# Altium PCB AC_board.PcbDoc (part 1 of 3)
Units mil, origin at the board's own origin, x right, y up, seen from the top; angles counter-clockwise.
Board outline 5905.51 x 3937.01 mil, 4 copper layers (Top Layer, Layer 1, Layer 2, Bottom Layer), stack 31.891 mil thick; 42 components, 37 nets, 171 pads, 2365 vias.
Unrouted connection lines stored in the file: 10.
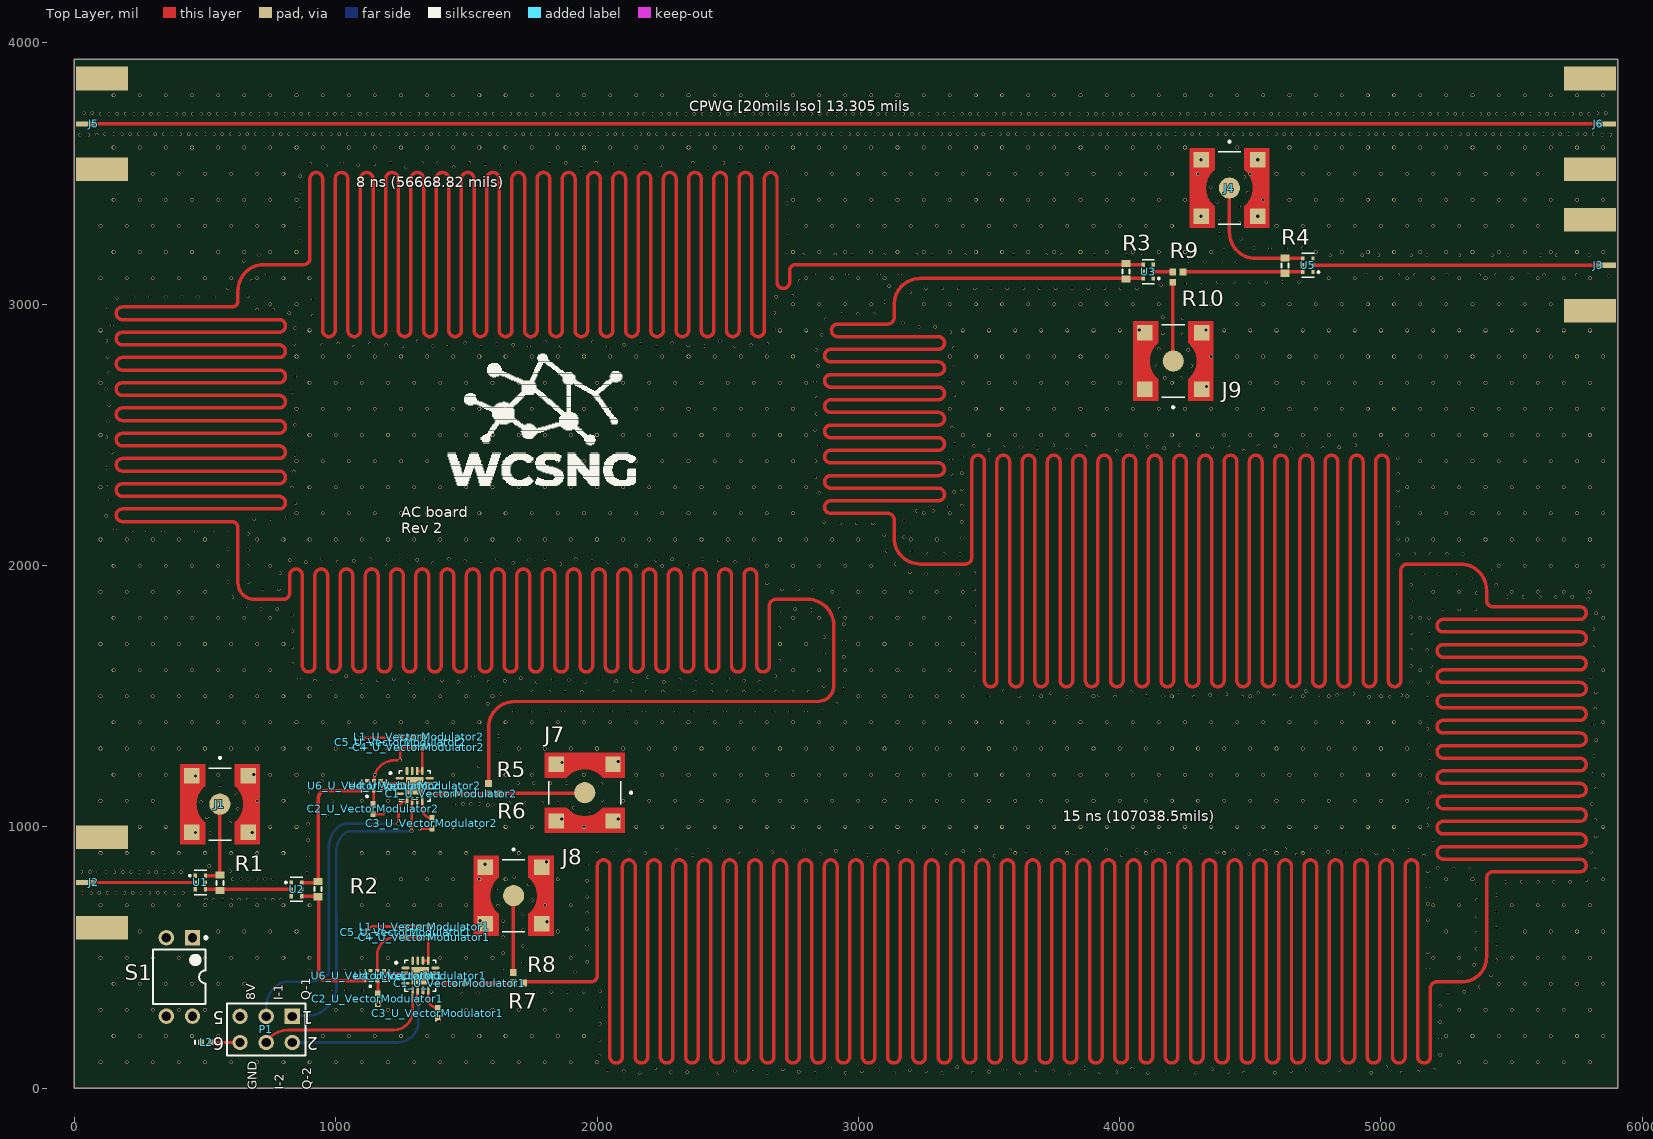
[diagram p0: Top Layer view]
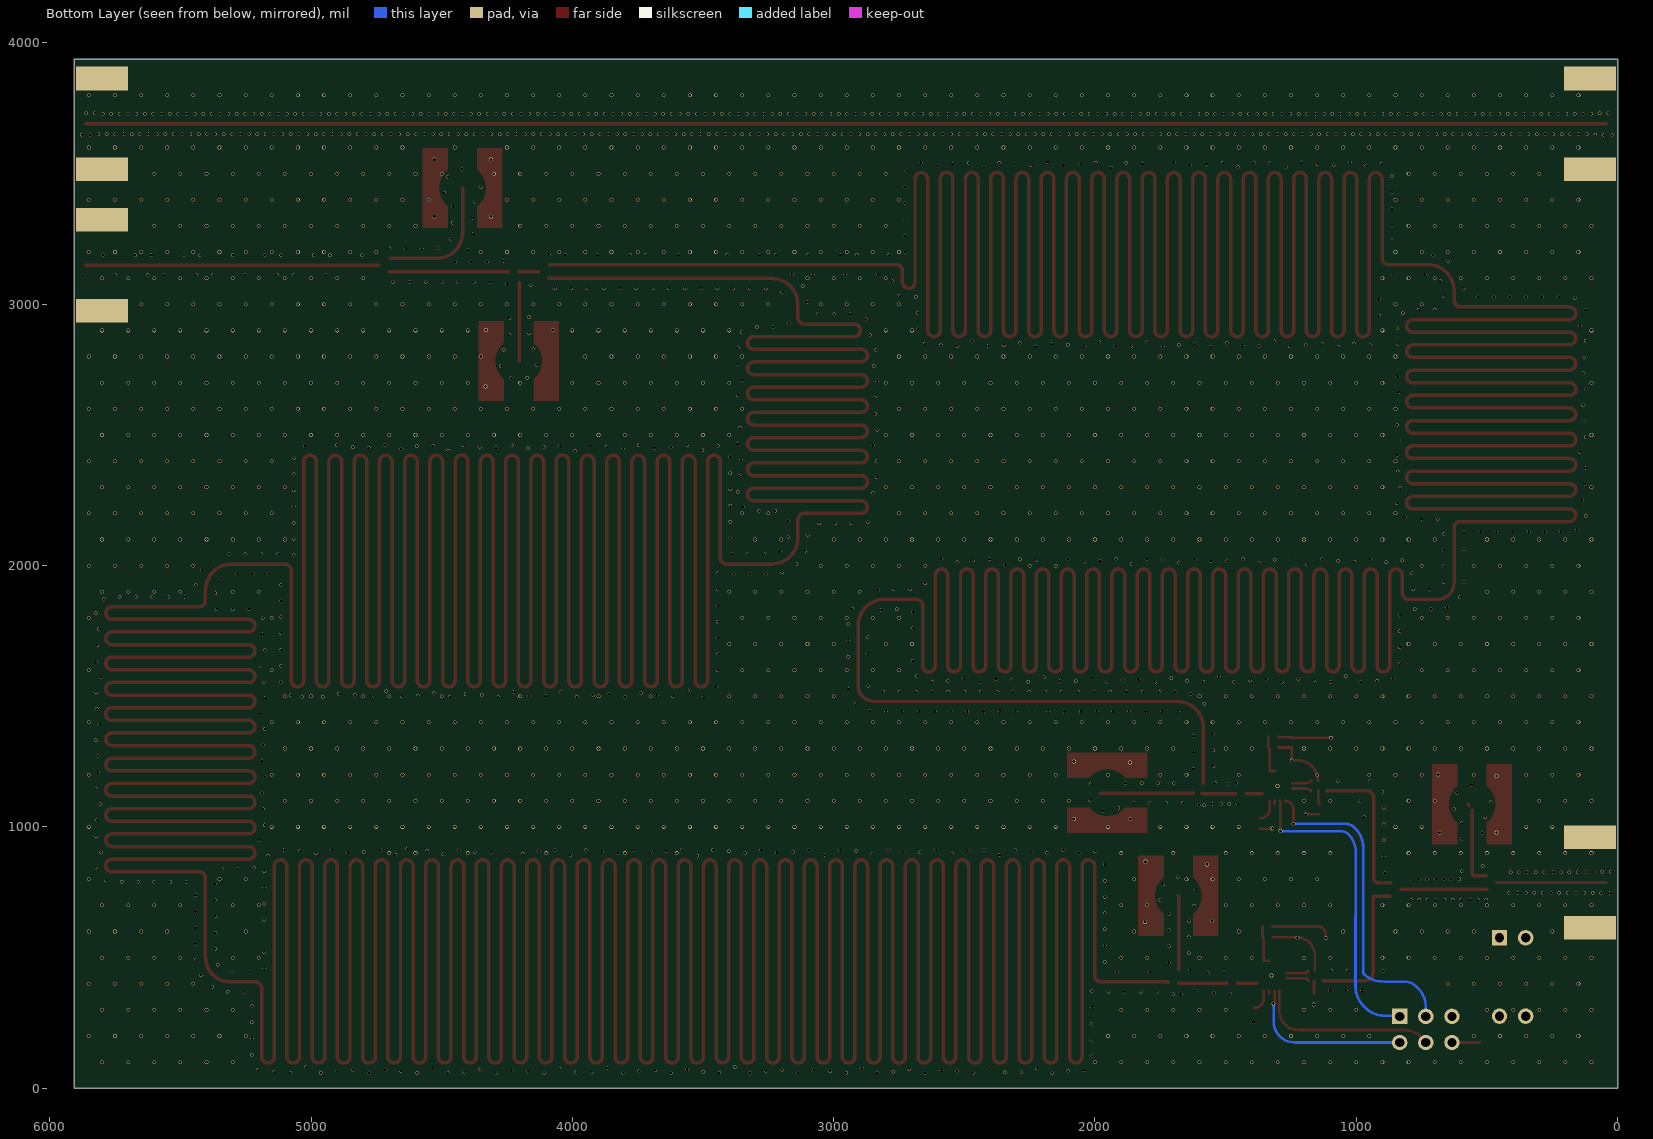
[diagram p1: Bottom Layer view, seen from below]
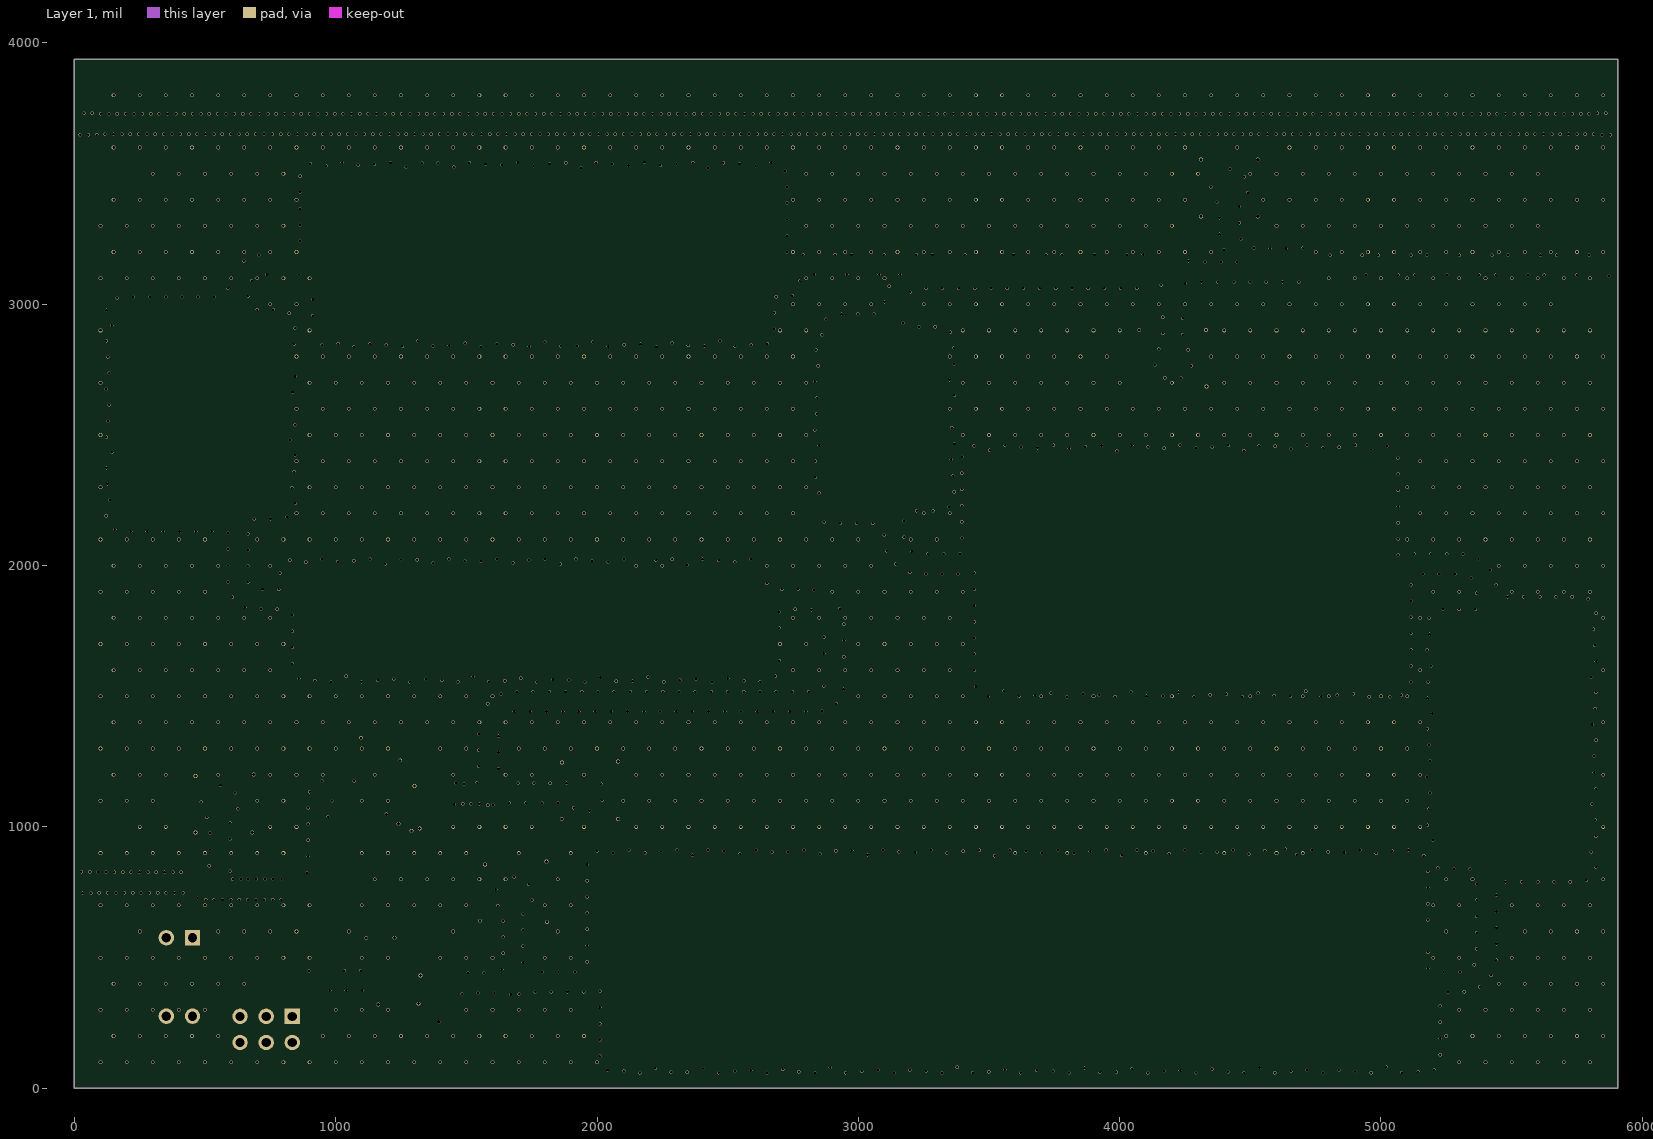
[diagram p2: Layer 1]
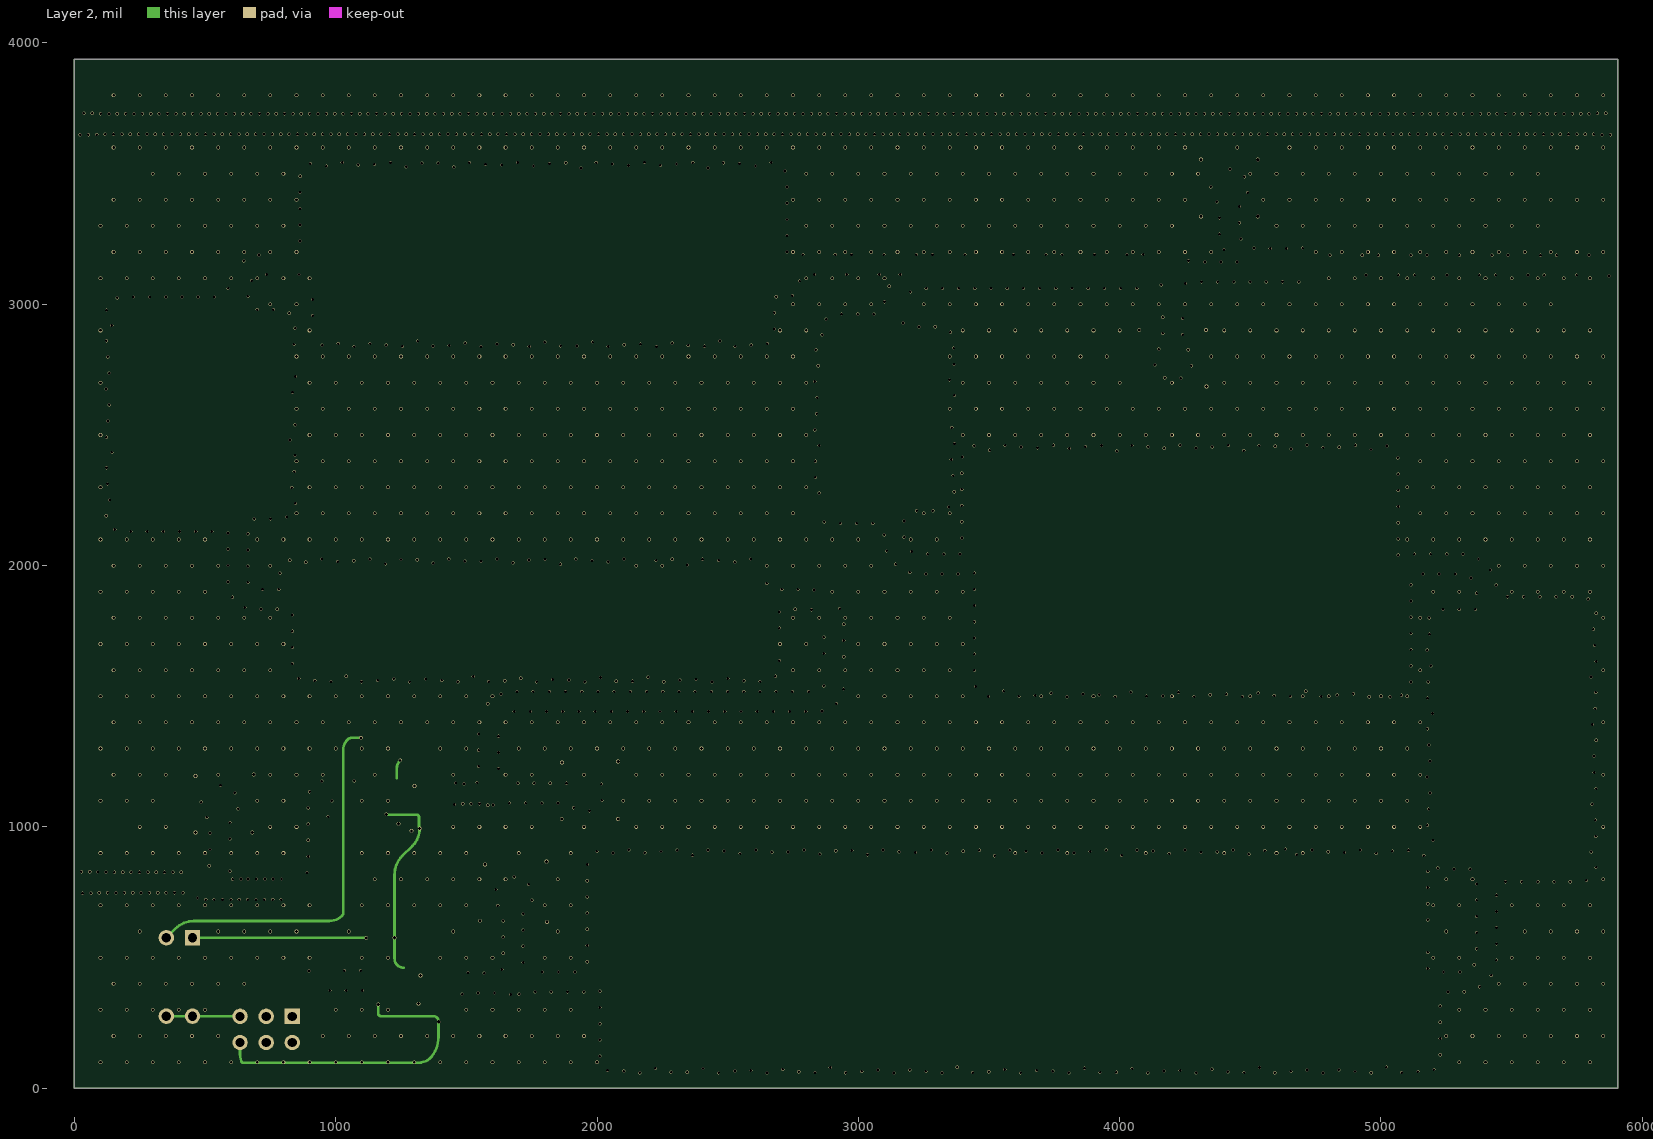
[diagram p3: Layer 2]

## Layer stack, top to bottom
Top Solder: solder mask 0.4, Solder Resist, Dk 3.5
Top Layer: signal copper 1.3778
Isola 408HR-1: prepreg 6.8898, FR4, Dk 3.64
Layer 1: signal copper 1.3778
Isola 408HR-Core: dielectric 12.6, FR-4, Dk 3.64
Layer 2: signal copper 1.3778
Isola 408HR-2: prepreg 6.8898, FR4, Dk 3.64
Bottom Layer: signal copper 1.3778
Bottom Solder: solder mask 0.4, Solder Resist, Dk 3.5

## Board outline
0,0 5905.51,0 5905.51,3937.01 0,3937.01

## Design rules (kind name [scope] priority, off if disabled: settings)
BoardOutlineClearance [All] p1: gap=10 ignorepadtopadclearanceinfootprint=FALSE
Clearance "Schematic Clearance Constraint_1" [InNetClass('HMC RF IN')] p1: gap=4.07 ignorepadtopadclearanceinfootprint=FALSE
Clearance "Schematic Clearance Constraint" [InNetClass('RF Nets')] p2: gap=20 ignorepadtopadclearanceinfootprint=FALSE except(3: Arc-SMDPad Track-SMDPad SMDPad-SMDPad)
Clearance "HMC RF IN Clearance" [InNetClass('HMC RF IN')] p3: gap=4.07 ignorepadtopadclearanceinfootprint=FALSE
Clearance [All] p4: gap=10 ignorepadtopadclearanceinfootprint=FALSE except(0: Arc-Hole Track-Hole SMDPad-Hole THPad-Hole Via-Hole Fill-Hole Poly-Hole Region-Hole Text-Hole; 6: Arc-Arc Arc-Track Arc-SMDPad Track-Track Track-SMDPad SMDPad-SMDPad)
Clearance "RF Clearance" [InNetClass('RF Nets')] p5: gap=10 ignorepadtopadclearanceinfootprint=FALSE
Length "Tap 2 Length" [InNet('No Net') And OnLayer('Top Layer')] p1: maxlimit=38652.77 minlimit=38652.77
Length "Tap 1 Length" [InNet('No Net') And OnLayer('Top Layer')] p2: maxlimit=24911.29 minlimit=24911.29
MatchedLengths [InNetClass('Taps')] p1: tolerance=0 checknetsindiffpair=FALSE checkdiffpairvsdiffpair=TRUE checkxsignals=TRUE checkothers=TRUE
MinimumSolderMaskSliver [All] p1: minsoldermaskwidth=0
PlaneConnect [All] p1: planeconnectstyle=Direct reliefexpansion=20 reliefentries=4 reliefconductorwidth=10 reliefairgap=10
PolygonConnect [All] p1: connectstyle=Direct reliefconductorwidth=10 reliefentries=4 polygonreliefangle="90 Angle" airgapwidth=10
RoomDefinition U_VectorModulator2 [InComponentClass('U_VectorModulator2')] p1: confinementstyle=ConfineIn formatcopy=TRUE lockcomponents=FALSE outline 1067.06,964.2 1497.06,964.2 1497.06,1389.2 1067.06,1389.2
RoomDefinition U_VectorModulator1 [InComponentClass('U_VectorModulator1')] p2: confinementstyle=ConfineIn formatcopy=TRUE lockcomponents=FALSE outline 1060.86,219.07 1490.86,219.07 1490.86,665.07 1060.86,665.07
RoutingVias [All] p1: holewidth=12 width=14 viastyle="Through Hole" minholewidth=8 minwidth=10 maxholewidth=17 maxwidth=20
SilkToSolderMaskClearance [IsPad] p1: minsilkscreentomaskgap=5 clearancetoexposedcopper=TRUE
SolderMaskExpansion [All] p1: expansion=4 istentingtop=FALSE
Width "Schematic Width Constraint_1" [InNetClass('RF Nets')] p1: maxlimit=13.3 minlimit=13.3 preferedwidth=13.3
Width "Schematic Width Constraint" [InNetClass('HMC RF IN')] p2: maxlimit=10 minlimit=10 preferedwidth=10
Width "HMC RF IN Width" [InNetClass('HMC RF IN')] p3: maxlimit=10 minlimit=10 preferedwidth=10
Width "RF Width" [InNetClass('RF Nets')] p4: maxlimit=13.3 minlimit=13.3 preferedwidth=13.31
Width [All] p5: maxlimit=10 minlimit=10 preferedwidth=10
27 further rules are at their usual default settings.

## Classes and differential pairs
net class "HMC RF IN": HMCIN_U_VectorModulator1 HMCIN_U_VectorModulator2 HMCINbar_U_VectorModulator1 HMCINbar_U_VectorModulator2
net class "RF Nets": B-IP B-OP NetC1_U_VectorModulator1_1 NetC1_U_VectorModulator1_2 NetC1_U_VectorModulator2_1 NetC1_U_VectorModulator2_2 NetJ5_SIG NetJ7_C NetJ8_C NetJ9_C NetR9_1 RF-C1 RF-C1-1 RF-C1-2 RF-S1 RF-S2-1 RF-S2-2 RXin TXout
channel class VectorModulator: U_VectorModulator1 U_VectorModulator2
component class U_VectorModulator2: C1_U_VectorModulator2 C2_U_VectorModulator2 C3_U_VectorModulator2 C4_U_VectorModulator2 C5_U_VectorModulator2 L1_U_VectorModulator2 U4_U_VectorModulator2 U6_U_VectorModulator2
component class U_VectorModulator1: C1_U_VectorModulator1 C2_U_VectorModulator1 C3_U_VectorModulator1 C4_U_VectorModulator1 C5_U_VectorModulator1 L1_U_VectorModulator1 U4_U_VectorModulator1 U6_U_VectorModulator1
component class AC_board: J2 J3 J4 J5 J6 J7 J8 J9 L2 R5 R6 R7 R8 R9 U1 U2 U3 U5

## Components (designator, comment, footprint, x,y, rotation, side; value= is the part's Value field where it differs from the comment)
C1_U_VectorModulator1 "Cap Semi" 0402 1474.67,401.51 r0 top value=5pF (schematic designator C1)
C1_U_VectorModulator2 "Cap Semi" 0402 1441.31,1127 r0 top value=5pF (schematic designator C1)
C2_U_VectorModulator1 "Cap Semi" 0402 1161,343 r90 top value=100pF (schematic designator C2)
C2_U_VectorModulator2 "Cap Semi" 0402 1143.32,1068.68 r90 top value=100pF (schematic designator C2)
C3_U_VectorModulator1 "Cap Semi" 0402 1390.24,287.69 r90 top value=100pF (schematic designator C3)
C3_U_VectorModulator2 "Cap Semi" 0402 1368.32,1013.68 r90 top value=100pF (schematic designator C3)
C4_U_VectorModulator1 "Cap Semi" 0402 1339.24,578 r0 top value=4.7uF (schematic designator C4)
C4_U_VectorModulator2 "Cap Semi" 0402 1317.31,1304 r0 top value=4.7uF (schematic designator C4)
C5_U_VectorModulator1 "Cap Semi" 0402 1270.24,597.69 r90 top value=100pF (schematic designator C5)
C5_U_VectorModulator2 "Cap Semi" 0402 1248.32,1323.68 r90 top value=100pF (schematic designator C5)
J1 "CONSMA001-SMD-G" *LINX_CONSMA001-SMD-G_CONSMA001-SMD-G(Primary) 557,1087.27 r0 top
J2 "SMA 50 Ohm edge" "SMA-OSHPARK-4L-1.6MM- ALT3" 5,787.4 r0 top locked
J3 "SMA 50 Ohm edge" "SMA-OSHPARK-4L-1.6MM- ALT3" 5900.51,3149.61 r180 top locked
J4 "CONSMA001-SMD-G" *LINX_CONSMA001-SMD-G_CONSMA001-SMD-G(Primary) 4420,3445 r0 top
J5 "SMA 50 Ohm edge" "SMA-OSHPARK-4L-1.6MM- ALT3" 5,3690 r0 top locked
J6 "SMA 50 Ohm edge" "SMA-OSHPARK-4L-1.6MM- ALT3" 5900.51,3690 r180 top locked
J7 "CONSMA001-SMD-G" *LINX_CONSMA001-SMD-G_CONSMA001-SMD-G(Primary) 1953,1131 r270 top
J8 "CONSMA001-SMD-G" *LINX_CONSMA001-SMD-G_CONSMA001-SMD-G(Primary) 1681,737 r0 top
J9 "CONSMA001-SMD-G" *LINX_CONSMA001-SMD-G_CONSMA001-SMD-G(Primary) 4205,2783 r180 top
L1_U_VectorModulator1 "Inductor" 0402-A 1339.24,619 r0 top value=0.33uH (schematic designator L1)
L1_U_VectorModulator2 "Inductor" 0402-A 1317.31,1345 r0 top value=0.33uH (schematic designator L1)
L2 "Inductor" 0402-A 504.08,176.02 r0 top value=10mH
P1 "Header 3X2" HDR2X3 834,275 r180 top
R1 "Res3" J1-0603 557,786 r270 top value=100
R2 "Res3" J1-0603 932,762 r270 top value=100
R3 "Res3" J1-0603 4024,3126 r270 top value=100
R4 "Res3" J1-0603 4633,3148 r270 top value=100
R5 "CRCW04020000Z0ED" RESC1005X40X25ML05T05 1585,1146.68 r90 top
R6 "CRCW04020000Z0ED" RESC1005X40X25ML05T05 1604.68,1127 r0 top
R7 "CRCW04020000Z0ED" RESC1005X40X25ML05T05 1699.68,403 r0 top
R8 "CRCW04020000Z0ED" RESC1005X40X25ML05T05 1680,423 r90 top
R9 "CRCW04020000Z0ED" RESC1005X40X25ML05T05 4223,3123.62 r0 top
R10 "CRCW04020000Z0ED" RESC1005X40X25ML05T05 4203,3104 r270 top
S1 "SW DIP-2" DIP-4 402,426 r270 top
U1 "Anaren PD0810J5050S2HF" *ANAREN_PD0409J7575S2HF 482.09,787.4 r0 top
U2 "Anaren PD0810J5050S2HF" *ANAREN_PD0409J7575S2HF 850,761 r0 top
U3 "Anaren PD0810J5050S2HF" *ANAREN_PD0409J7575S2HF 4109.49,3125 r180 top
U4_U_VectorModulator1 "HMC630" *QFN50P300X300X100-17N 1324.14,430.91 r0 top (schematic designator U4)
U4_U_VectorModulator2 "HMC630" *QFN50P300X300X100-17N 1302.21,1156.91 r0 top (schematic designator U4)
U5 "Anaren PD0810J5050S2HF" *ANAREN_PD0409J7575S2HF 4720.51,3149.61 r180 top
U6_U_VectorModulator1 "ANAREN_BD0810J50100AHF" *ANAREN_PD0409J7575S2HF 1158.98,430.51 r90 top (schematic designator U6)
U6_U_VectorModulator2 "ANAREN_BD0810J50100AHF" *ANAREN_PD0409J7575S2HF 1146.31,1157 r90 top (schematic designator U6)

## Footprints (in the part's own frame and the unit in brackets; to place one, negate y for a bottom-side part, rotate by r counter-clockwise, add the part's x,y. Pads: shape width x height; smd on the part's side, far side on the other; paste and mask are expansions set on the pad)
0402 [mm] "Chip Capacitor, Body 1.0x0.5mm, IPC High Density"
  rect 0.6x0.5 smd: 1(-0.5,0) 2(0.5,0)
  body extent -0.55,-0.3 0.55,0.3, height 1.3
0402-A [mm] "Chip Inductor, Body 1.0x0.5mm, IPC High Density"
  rect 0.6x0.5 smd: 1(-0.5,0) 2(0.5,0)
  silkscreen extent -1.1,-0.15 -1.1,0.15, body extent -0.55,-0.3 0.55,0.3, height 0.55
*ANAREN_PD0409J7575S2HF [mm]
  rect 0.33x0.41 smd: 1(-0.495,0.66) 2(-0.495,0) 3(-0.495,-0.66) 4(0.495,-0.66) 5(0.495,0) 6(0.495,0.66)
  silkscreen extent -1.05,-1.17 0.6,1.17
*LINX_CONSMA001-SMD-G_CONSMA001-SMD-G(Primary) [mm]
  round 2.05 smd: C(0,0)
  rect 1.5x1.5 smd: G1(-2.75,2.75) G2(-2.75,-2.75) G3(2.75,-2.75) G4(2.75,2.75)
  Top Layer region: -1.44,3.88 -1.44,1.76 -1.54,1.68 -1.6,1.624 -1.687,1.534 -1.769,1.439 -1.845,1.34 -1.916,1.237 -1.981,1.13 -2.04,1.02 -2.093,0.907 -2.139,0.791 -2.18,0.672 -2.213,0.552 -2.241,0.43 -2.261,0.307 -2.275,0.182 -2.281,0.058 -2.281,-0.067 -2.275,-0.192 -2.261,-0.317 -2.241,-0.44 -2.213,-0.562 -2.18,-0.682 -2.139,-0.801 -2.093,-0.917 -2.04,-1.03 -1.981,-1.14 -1.916,-1.247 -1.845,-1.35 -1.769,-1.449 -1.687,-1.544 -1.6,-1.634 -1.54,-1.69 -1.44,-1.76 -1.44,-3.88 -3.88,-3.88 -3.88,3.88 -1.44,3.88
  Top Layer region: 1.44,-3.88 1.44,-1.76 1.54,-1.68 1.573,-1.651 1.663,-1.56 1.747,-1.465 1.827,-1.365 1.9,-1.26 1.968,-1.152 2.029,-1.04 2.085,-0.925 2.133,-0.807 2.175,-0.686 2.21,-0.564 2.239,-0.439 2.26,-0.313 2.274,-0.186 2.281,-0.059 2.281,0.069 2.274,0.196 2.26,0.323 2.239,0.449 2.21,0.574 2.175,0.696 2.133,0.817 2.085,0.935 2.029,1.05 1.968,1.162 1.9,1.27 1.827,1.375 1.747,1.475 1.663,1.57 1.573,1.661 1.54,1.69 1.44,1.76 1.44,3.88 3.88,3.88 3.88,-3.88 1.44,-3.88
  silkscreen extent -1.1,-3.5 1.1,4.6
*QFN50P300X300X100-17N [mm]
  oval 0.8x0.26 smd: 1(-1.455,0.75) 2(-1.455,0.25) 3(-1.455,-0.25) 4(-1.455,-0.75) 9(1.455,-0.75) 10(1.455,-0.25) 11(1.455,0.25) 12(1.455,0.75)
  oval 0.26x0.8 smd: 5(-0.75,-1.455) 6(-0.25,-1.455) 7(0.25,-1.455) 8(0.75,-1.455) 13(0.75,1.455) 14(0.25,1.455) 15(-0.25,1.455) 16(-0.75,1.455)
  rect 1.7x1.7 smd: 17(0,0)
  silkscreen extent -2.45,-1.5 1.5,1.5
DIP-4 [mm] "DIP; 4 Leads; Row Spacing 7.62 mm; Pitch 2.54 mm"
  rect 1.5x1.5 hole 0.9: 1(-3.81,1.27)
  round 1.5 hole 0.9: 2(-3.81,-1.27) 3(3.81,-1.27) 4(3.81,1.27)
  silkscreen extent -3.93,-2.55 2.65,2.7, body extent -3.15,-2.5 3.15,2.5, height 5.6
HDR2X3 [mm] "Connector; Header; 3x2 Position"
  rect 1.5x1.5 hole 0.9: 1(0,0)
  round 1.5 hole 0.9: 2(0,2.54) 3(2.54,0) 4(2.54,2.54) 5(5.08,0) 6(5.08,2.54)
  silkscreen extent -1.27,-1.27 6.35,3.81
J1-0603 [mm] "Chip Resistor, Body 1.6x0.8mm, IPC High Density"
  rect 0.7x0.9 smd: 1(-0.75,0) 2(0.75,0)
  silkscreen extent -0.2,-0.35 0.2,0.35, body extent -0.85,-0.48 0.85,0.48, height 0.9
RESC1005X40X25ML05T05 [mm] "Chip Resistor, 2-Leads, Body 1.00x0.50mm, IPC Low Density"
  rect 0.65x0.65 smd: 1(-0.5,0) 2(0.5,0)
  body extent -0.53,-0.27 0.53,0.28, height 0.4
"SMA-OSHPARK-4L-1.6MM- ALT3" [mil] "Short and thin signal pin"
  rect 200x90 smd: GND(101,-174) GND(101,174)
  rect 200x90 smd far side: GND(101,-174) GND(101,174)
  rect 75x20 smd: SIG(38.5,0)

## Part data
C1_U_VectorModulator1 C1_U_VectorModulator2 C2_U_VectorModulator1 C2_U_VectorModulator2 C3_U_VectorModulator1 C3_U_VectorModulator2 C4_U_VectorModulator1 C4_U_VectorModulator2 C5_U_VectorModulator1 C5_U_VectorModulator2: "Capacitor (Semiconductor SIM Model)", LatestRevisionDate=29-May-2009, LatestRevisionNote="IPC-7351 Footprint Added.", PackageDescription="Chip Capacitor", PackageReference=C1206, Published=8-Jun-2000, Publisher="Altium Limited"
J1 J4: "50 Ohm Gold Plated Female PCB Mount SMA Connector", Package=None, Supplier Part Number 1=CONSMA001-SMD-G-ND, Digi-Key_Part_Number=CONSMA001-SMD-G-ND, Digi-Key_Purchase_URL=https://www.digikey.com/product-detail/en/linx-technologies-inc/CONSMA001-SMD-G/CONSMA001-SMD-G-ND/4496569?utm_source=snapeda&utm_medium=aggregator&utm_campaign=symbol, MF="Linx Technologies", MP=CONSMA001-SMD-G, SnapEDA_Link=https://www.snapeda.com/parts/CONSMA001-SMD-G/Linx%20Technologies%20Inc./view-part/?ref=snap, Supplier 1=Digi-Key
J2 J3 J5 J6: library part SMA-OSHPARK-4L-1.6MM-ALT3, Package=SMA-OSHPARK-4L-1.6MM, Supplier Part Number 1=J658-ND, DeviceName=-OSHPARK-4L-1.6MM, DeviceSetName=SMA, GateName_1=G1, LibraryName=dword1511-connectors, Supplier 1=Digi-Key, SymbolName_1=COAX
J7 J8 J9: "50 Ohm Gold Plated Female PCB Mount SMA Connector", Package=None, Digi-Key_Part_Number=CONSMA001-SMD-G-ND, Digi-Key_Purchase_URL=https://www.digikey.com/product-detail/en/linx-technologies-inc/CONSMA001-SMD-G/CONSMA001-SMD-G-ND/4496569?utm_source=snapeda&utm_medium=aggregator&utm_campaign=symbol, MF="Linx Technologies", MP=CONSMA001-SMD-G, SnapEDA_Link=https://www.snapeda.com/parts/CONSMA001-SMD-G/Linx%20Technologies%20Inc./view-part/?ref=snap
P1: "Header, 3-Pin, Dual row", LatestRevisionDate=17-Jul-2002, LatestRevisionNote="Re-released for DXP Platform.", Publisher="Altium Limited"
R1 R2 R3 R4: "Resistor", LatestRevisionDate=29-May-2009, LatestRevisionNote="IPC-7351 Footprint Added.", PackageDescription="Chip Resistor", PackageReference=J1-0603, Published=8-Jun-2000, Publisher="Altium Limited"
R5 R6 R7 R8 R9 R10: library part CMP-2002-08122-1, Manufacturer="Vishay Dale", Part Number=CRCW04020000Z0ED
S1: "DIP Switch, 2 Position, SPST", LatestRevisionDate=17-Jul-2002, LatestRevisionNote="Re-released for DXP Platform.", PackageReference=DIP-4, Published=24-Mar-1999, Publisher="Altium Limited"
U1 U2 U3 U5: Supplier Part Number 1=1173-1093-1-ND, Supplier 1=Digi-Key, U*=1173-1093-1-ND
U4_U_VectorModulator1 U4_U_VectorModulator2: Supplier Part Number 1=1127-1497-ND, Supplier 1=Digi-Key
U6_U_VectorModulator1 U6_U_VectorModulator2: Supplier Part Number 1=1173-1056-1-ND, Supplier 1=Digi-Key
L1_U_VectorModulator1 L1_U_VectorModulator2 L2: Code_IEC=1005, Code_JEITA=0402, LatestRevisionDate=29-May-2009, LatestRevisionNote="IPC-7351 Footprint Added.", PackageDescription="Chip Inductor", PackageReference=0402-A, Published=8-Jun-2000, Publisher="Altium Limited"

## Via types
v1: diameter 12, hole 10, Top Layer to Bottom Layer, 1188 vias
v2: diameter 14, hole 10, Top Layer to Bottom Layer, 1145 vias
v3: diameter 15, hole 12, Top Layer to Bottom Layer, 21 vias
v4: diameter 14, hole 12, Top Layer to Bottom Layer, 11 vias

## Nets (pads, with @x,y where several pads share a name; then routed paths per layer and width w, separated by ;. In a path a pad name is that pad's centre, name@x,y a point inside that pad or via, vN(x,y) a via of type N, cw(c..) or ccw(c..) an arc to the next point about the centre after c; other vN are vias at no path point)
8V: P1.5 S1.3 S1.4 | length 282.3
  Layer 2 w10: S1.3@352,276 S1.4@452,276 631.59,276 cw(c631.59,272.59) P1.5@634,275
8V1: C5_U_VectorModulator2.2 L1_U_VectorModulator2.1 S1.2 | length 1638.3
  Top Layer w10: v4(1097,1341) 1242.59,1341 ccw(c1242.59,1349.09) C5_U_VectorModulator2.2@1248.31,1343.37 1293.69,1343.37 ccw(c1293.69,1348.94) L1_U_VectorModulator2.1@1297.63,1345
  Layer 2 w10: S1.2@352,579.58 S1.2@352,576 386.71,610.71 cw(c457.42,540) 457.42,640 975.72,640 ccw(c975.72,708.28) 1024,660 ccw(c1011.93,672.07) 1029,672.07 1029,1295.37 cw(c1083.63,1295.37) 1045,1334 cw(c1061.9,1317.1) 1061.9,1341 v4(1097,1341)
8V2: C5_U_VectorModulator1.2 L1_U_VectorModulator1.1 S1.1 | length 898.2
  Top Layer w10: v4(1116.86,575.07) 1116.86,586.51 cw(c1154.41,586.51) 1127.86,613.07 cw(c1142.17,598.76) 1142.17,619 L1_U_VectorModulator1.1@1319.56,619
  Layer 2 w10: S1.1@452,576 v4@1116,576